# Altium PCB PCB_23GXSTM32F1031.0EXP_2026-02-23.pcbdoc (part 1 of 2)
Units mil, origin at the board's own origin, x right, y up, seen from the top; angles counter-clockwise.
Board outline 5147 x 5153.94 mil, 2 copper layers (Top Layer, Bottom Layer); 48 components, 78 nets, 348 pads, 55 vias.
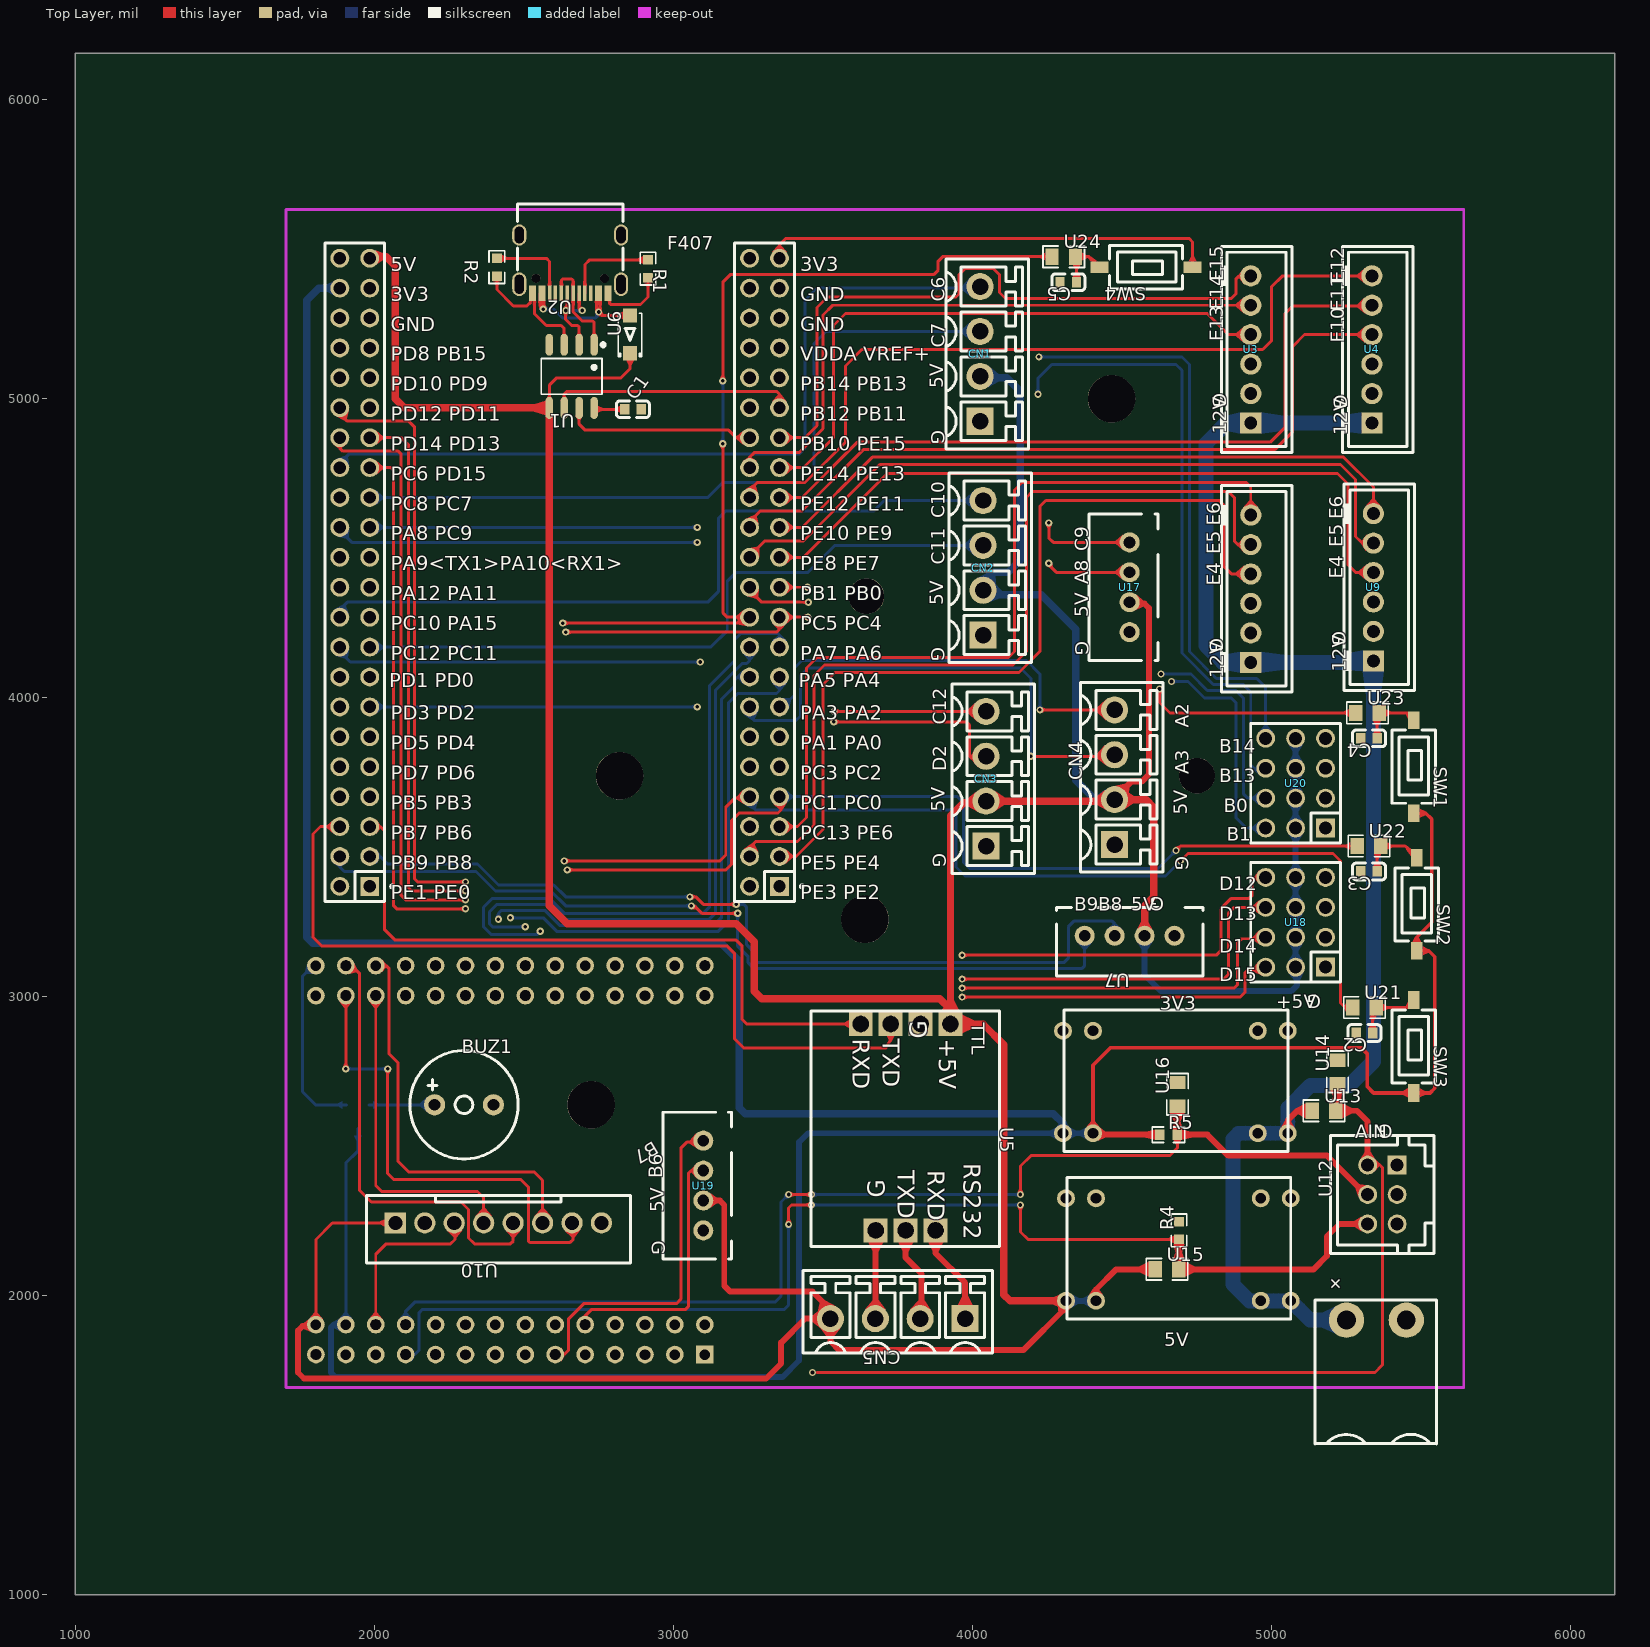
[diagram p0: Top Layer view]
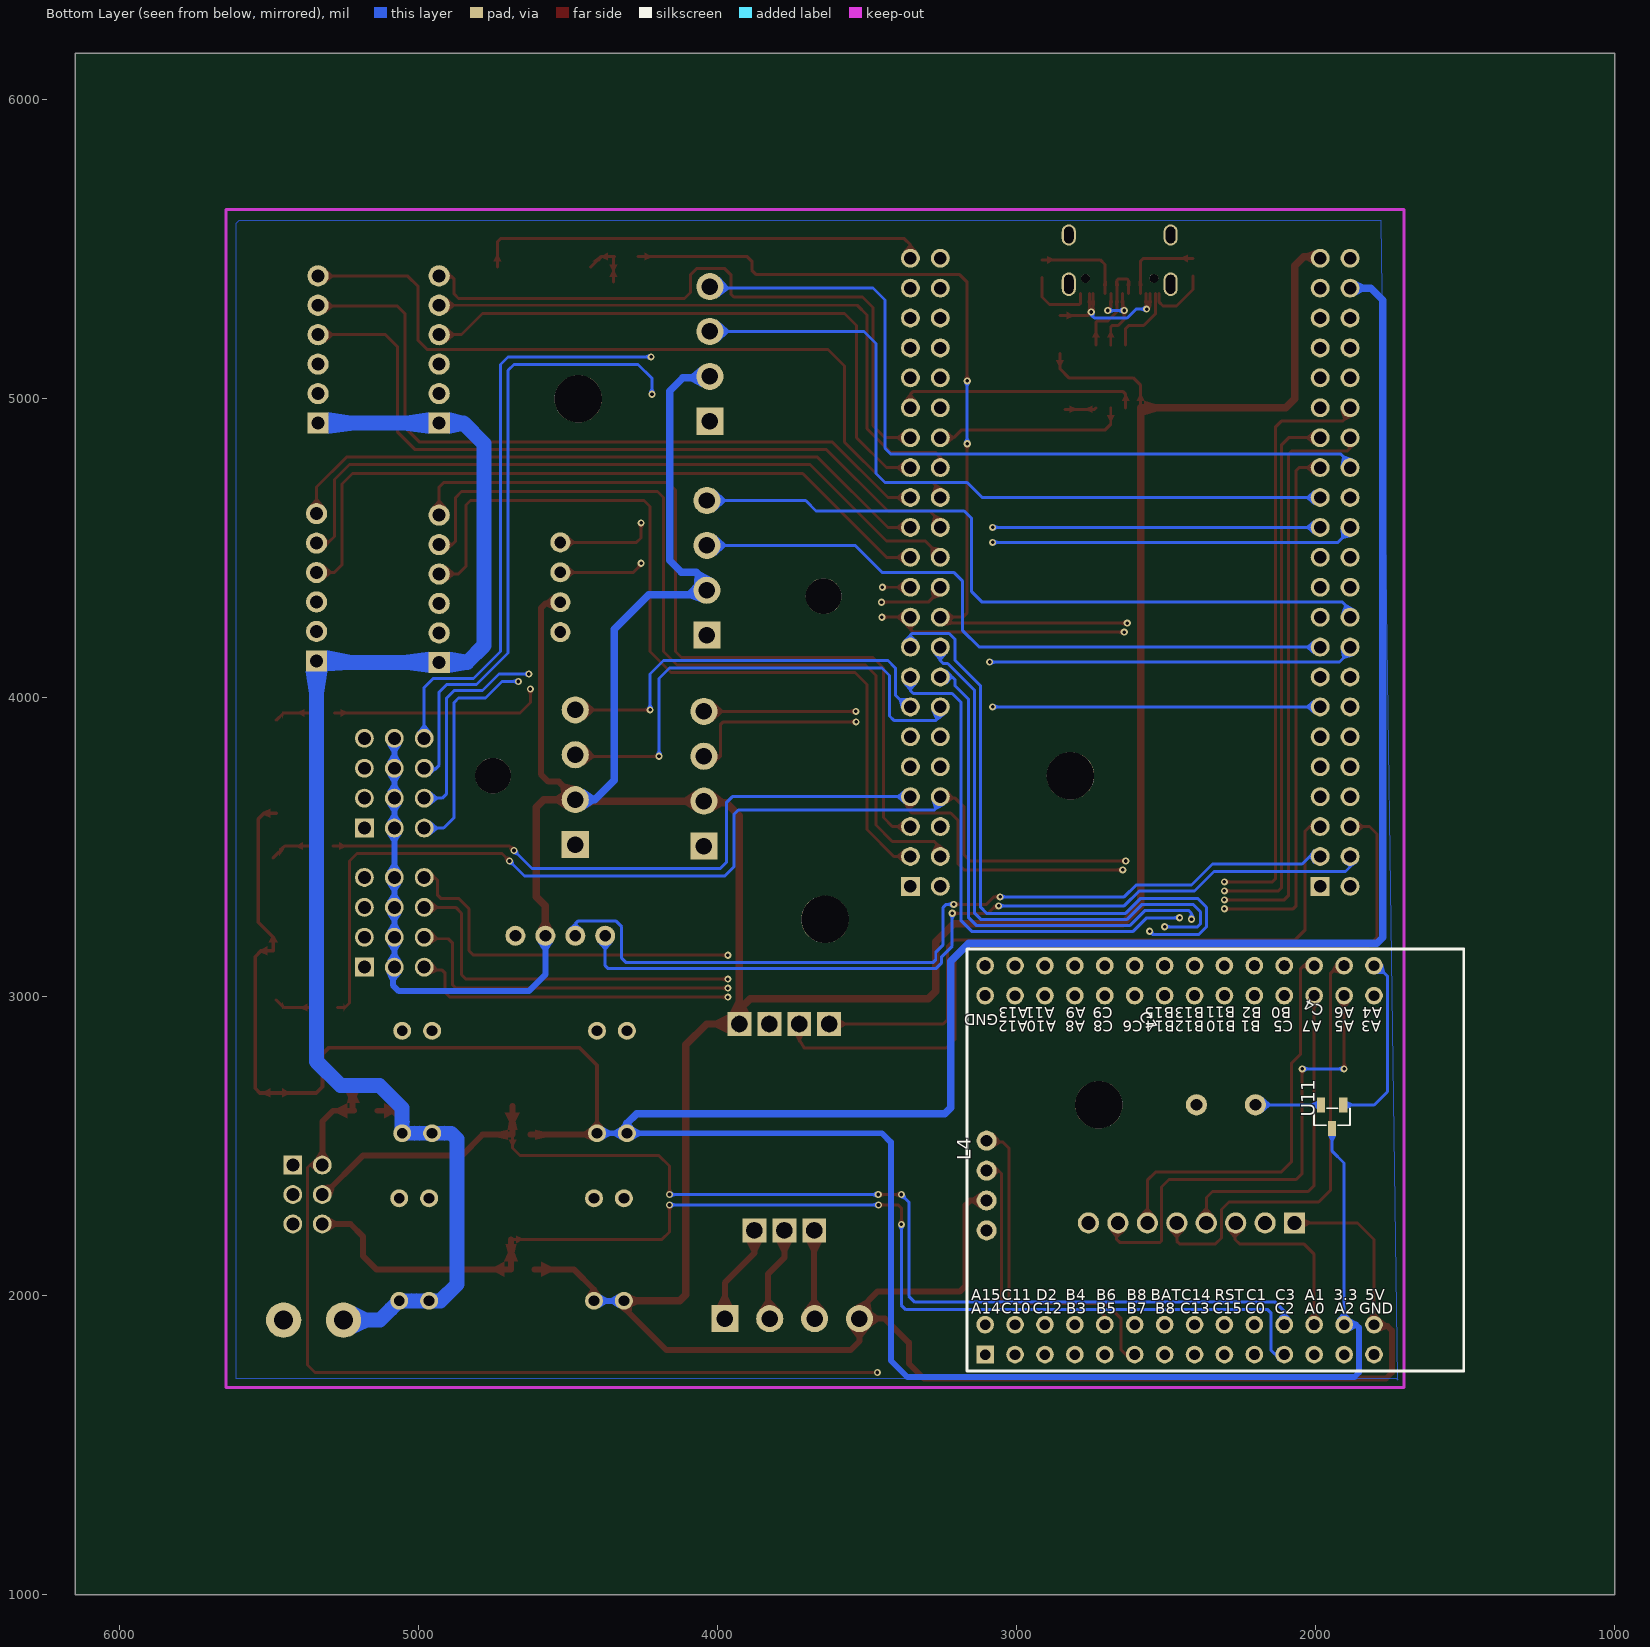
[diagram p1: Bottom Layer view, seen from below]

## Layer stack, top to bottom
Top Layer: signal copper (thickness not stored)
Dielectric: dielectric 12.6, FR-4, Dk 4.8
Bottom Layer: signal copper (thickness not stored)

## Board outline
6147,1000 1000,1000 1000,6153.94 6147,6153.94

## Components (designator, comment, footprint, x,y, rotation, side; value= is the part's Value field where it differs from the comment)
3V3 "降压24到5V最大5AFIX" 降压24到5V最大5AFIX 4660,2718.39 r180 top
5V "降压24到5V最大5AFIX" 降压24到5V最大5AFIX 4670,2158.39 r180 top
12V "CONN-TH_6P-P2.50_B6B-XH-A-LF-SN" CONN-TH_6P-P2.50_B6B-XH-A-LF-SN 4930,4363.39 r90 top
+ "CONN-TH_WJ2EDGR-5.08-2P" CONN-TH_WJ2EDGR-5.08-2P 5350,1918.39 r0 top
BUZ1 "BUZ-TH_BD9.0-P5.00-D0.6-FD" BUZ-TH_BD9.0-P5.00-D0.6-FD 2300,2638.39 r0 top
C1 "C0603" C0603 2865,4963.39 r0 top
C2 "C0603" C0603 5310,2878.39 r180 top
C3 "C0603" C0603 5325,3418.39 r180 top
C4 "C0603" C0603 5325,3863.39 r180 top
C5 "C0603" C0603 4320,5388.39 r180 top
CN1 "CONN-TH_4P-P3.81_WJ2EDGVC-3.81-4P" CONN-TH_4P-P3.81_WJ2EDGVC-3.81-4P 4025,5148.39 r90 top
CN2 "CONN-TH_4P-P3.81_WJ2EDGVC-3.81-4P" CONN-TH_4P-P3.81_WJ2EDGVC-3.81-4P 4035,4433.39 r90 top
CN3 "CONN-TH_4P-P3.81_WJ2EDGVC-3.81-4P" CONN-TH_4P-P3.81_WJ2EDGVC-3.81-4P 4045,3728.39 r90 top
CN4 "CONN-TH_4P-P3.81_WJ2EDGVC-3.81-4P" CONN-TH_4P-P3.81_WJ2EDGVC-3.81-4P 4475,3733.39 r90 top
CN5 "CONN-TH_4P-P3.81_WJ2EDGVC-3.81-4P" CONN-TH_4P-P3.81_WJ2EDGVC-3.81-4P 3750,1923.39 r180 top
F407 "STM32F407VGT6B1" STM32F407VGT6B1 2675,4448.39 r0 top
L4 "STM32L431RCT6XPB" STM32L431RCT6XPB 1805,3103.39 r270 bottom
R1 "R0603" R0603 2915,5433.39 r270 top
R2 "R0603" R0603 2410,5438.39 r270 top
R4 "R0603" R0603 4690,2218.39 r90 top
R5 "R0603" R0603 4655,2538.39 r0 top
SW1 "SW-SMD_L6.1-W3.6-LS7.9" SW-SMD_L6.1-W3.6-LS7.9 5475,3768.39 r270 top
SW2 "SW-SMD_L6.1-W3.6-LS7.9" SW-SMD_L6.1-W3.6-LS7.9 5485,3308.39 r270 top
SW3 "SW-SMD_L6.1-W3.6-LS7.9" SW-SMD_L6.1-W3.6-LS7.9 5475,2833.39 r270 top
SW4 "SW-SMD_L6.1-W3.6-LS7.9" SW-SMD_L6.1-W3.6-LS7.9 4580,5438.39 r180 top
U1 "SOP-8_L4.9-W3.9-P1.27-LS6.0-BL" SOP-8_L4.9-W3.9-P1.27-LS6.0-BL 2660,5073.39 r180 top
U2 "USB-C_SMD-TYPE-C-31-M-12" USB-C_SMD-TYPE-C-31-M-12 2655,5448.39 r180 top
U3 "CONN-TH_6P-P2.50_B6B-XH-A-LF-SN" CONN-TH_6P-P2.50_B6B-XH-A-LF-SN 4930,5163.39 r90 top
U4 "CONN-TH_6P-P2.50_B6B-XH-A-LF-SN" CONN-TH_6P-P2.50_B6B-XH-A-LF-SN 5335,5163.39 r90 top
U5 "TTL2RS232" TTL2RS232 3775,2553.39 r270 top
U6 "SOD-123FL_L2.8-W1.8-LS3.7-RD" SOD-123FL_L2.8-W1.8-LS3.7-RD 2855,5213.39 r90 top
U7 "CONN-TH_B4B-XH-A-LF-SN" CONN-TH_B4B-XH-A-LF-SN 4525,3203.39 r180 top
U9 "CONN-TH_6P-P2.50_B6B-XH-A-LF-SN" CONN-TH_6P-P2.50_B6B-XH-A-LF-SN 5340,4368.39 r90 top
U10 "CONN-TH_B8B-XH-A-LF-SN" CONN-TH_B8B-XH-A-LF-SN 2415,2243.39 r180 top
U11 "SOT-23-3_L2.9-W1.3-P1.90-LS2.4-BR" SOT-23-3_L2.9-W1.3-P1.90-LS2.4-BR 1945,2598.39 r270 bottom
U12 "CONN-TH_6P-P2.50_HCTL_HC-XHD-2X3A" CONN-TH_6P-P2.50_HCTL_HC-XHD-2X3A 5370,2338.39 r90 top
U13 "R0805" R0805 5175,2618.39 r0 top
U14 "R0805" R0805 5220,2748.39 r90 top
U15 "R0805" R0805 4650,2088.39 r0 top
U16 "R0805" R0805 4685,2673.39 r90 top
U17 "CONN-TH_B4B-XH-A-LF-SN" CONN-TH_B4B-XH-A-LF-SN 4525,4368.39 r90 top
U18 "HDR-TH_12P-P2.54-V-M-R3-C4-S2.54" HDR-TH_12P-P2.54-V-M-R3-C4-S2.54 5080,3248.39 r90 top
U19 "CONN-TH_B4B-XH-A-LF-SN" CONN-TH_B4B-XH-A-LF-SN 3100,2368.39 r90 top
U20 "HDR-TH_12P-P2.54-V-M-R3-C4-S2.54" HDR-TH_12P-P2.54-V-M-R3-C4-S2.54 5080,3713.39 r90 top
U21 "R0805" R0805 5310,2963.39 r0 top
U22 "R0805" R0805 5325,3503.39 r0 top
U23 "R0805" R0805 5320,3948.39 r0 top
U24 "R0805" R0805 4305,5473.39 r0 top

## Footprints (in the part's own frame and the unit in brackets; to place one, negate y for a bottom-side part, rotate by r counter-clockwise, add the part's x,y. Pads: shape width x height; smd on the part's side, far side on the other; paste and mask are expansions set on the pad)
BUZ-TH_BD9.0-P5.00-D0.6-FD [mm]
  round 1.8 hole 1 paste+0 mask+0.051: 1(-2.5,0) 2(2.5,0)
  silkscreen extent -4.6,-4.6 4.6,4.6
C0603 [mm]
  rect 0.8x0.9 smd paste+0 mask+0.051: 1(-0.7,0) 2(0.7,0)
  silkscreen extent -1.41,-0.71 1.39,0.72
CONN-TH_4P-P3.81_WJ2EDGVC-3.81-4P [mm]
  rect 2.3x2.3 hole 1.4 paste+0 mask+0.051: 1(-5.715,0)
  round 2.3 hole 1.4 paste+0 mask+0.051: 2(-1.905,0) 3(1.905,0) 4(5.715,0)
  silkscreen extent -8.06,-4.1 8.06,2.9
CONN-TH_6P-P2.50_B6B-XH-A-LF-SN [mm]
  rect 1.8x1.8 hole 1.1 paste+0 mask+0.051: 1(-6.251,0.001)
  round 1.8 hole 1.1 paste+0 mask+0.051: 2(-3.749,-0.001) 3(-1.249,-0.001) 4(1.251,-0.001) 5(3.751,-0.001) 6(6.251,-0.001)
  silkscreen extent -8.75,-3.5 8.75,2.5
CONN-TH_6P-P2.50_HCTL_HC-XHD-2X3A [mm]
  rect 1.6x1.6 hole 1.1 paste+0 mask+0.05: 1(2.5,-1.25)
  round 1.6 hole 1.1 paste+0 mask+0.05: 2(2.5,1.25) 3(0,-1.25) 4(0,1.25) 5(-2.5,-1.25) 6(-2.5,1.25)
  silkscreen extent -5,-4.4 5,4.4
CONN-TH_B4B-XH-A-LF-SN [mm]
  round 1.7 hole 1 paste+0 mask+0.051: 1(-3.81,0) 2(-1.27,0) 3(1.27,0) 4(3.81,0)
  silkscreen extent -6.22,-2.41 6.22,3.43
CONN-TH_B8B-XH-A-LF-SN [mm]
  rect 1.8x1.8 hole 1.2 paste+0 mask+0.051: 1(8.75,0)
  round 1.8 hole 1.2 paste+0 mask+0.051: 2(6.25,0) 3(3.75,0) 4(1.25,0) 5(-1.25,0) 6(-3.75,0) 7(-6.25,0) 8(-8.75,0)
  silkscreen extent -11.22,-2.35 11.22,3.4
CONN-TH_WJ2EDGR-5.08-2P [mm]
  round 3 hole 1.6 paste+0 mask+0.051: 1(-2.54,0) 2(2.54,0)
  silkscreen extent -5.21,-10.5 5.12,1.7
HDR-TH_12P-P2.54-V-M-R3-C4-S2.54 [mm]
  rect 1.6x1.6 hole 1.1 paste+0 mask+0.05: 1(-3.81,-2.54)
  round 1.6 hole 1.1 paste+0 mask+0.05: 2(-3.81,0) 3(-3.81,2.54) 4(-1.27,-2.54) 5(-1.27,0) 6(-1.27,2.54) 7(1.27,-2.54) 8(1.27,0) 9(1.27,2.54) 10(3.81,-2.54) 11(3.81,0) 12(3.81,2.54)
  silkscreen extent -5.08,-3.81 5.08,3.81
R0603 [mil]
  rect 31.75x34.02 smd paste-3937.01 mask+2: 1(-29.65,0) 2(29.66,0)
  silkscreen extent -55,-26 55,26
R0805 [mil]
  rect 44.59x54.21 smd paste-3937.01 mask+2: 1(-39.37,0) 2(39.37,0)
  silkscreen extent -69,-36 69,36
SOD-123FL_L2.8-W1.8-LS3.7-RD [mm]
  rect 1.2x1.2 smd paste+0 mask+0.051: 1(-1.6,0) 2(1.6,0)
  silkscreen extent -1.9,-1 1.8,1
SOP-8_L4.9-W3.9-P1.27-LS6.0-BL [mm]
  oval 0.63x1.865 smd paste+0 mask+0.051: 1(-1.905,-2.682) 2(-0.635,-2.682) 3(0.635,-2.682) 4(1.905,-2.682) 5(1.905,2.682) 6(0.635,2.682) 7(-0.635,2.682) 8(-1.905,2.682)
  silkscreen extent -2.82,-2.83 2.58,1.52
SOT-23-3_L2.9-W1.3-P1.90-LS2.4-BR [mm]
  rect 1.25x0.7 smd paste+0 mask+0.051: 1(-1,0.95) 2(-1,-0.95) 3(1,0)
  silkscreen extent -0.73,-1.53 0.73,1.53
STM32F407VGT6B1 [mm]
  rect 1.6x1.6 hole 1.05 paste+0 mask+0.051: 1(-17.526,-27.432) 1(17.264,-27.432)
  round 1.6 hole 1.05 paste+0 mask+0.051: 2(-20.066,-27.432) 2(14.724,-27.432) 3(-17.526,-24.892) 3(17.264,-24.892) 4(-20.066,-24.892) 4(14.724,-24.892) 5(-17.526,-22.352) 5(17.264,-22.352) 6(-20.066,-22.352) 6(14.724,-22.352) 7(-17.526,-19.812) 7(17.264,-19.812) 8(-20.066,-19.812) 8(14.724,-19.812) 9(-17.526,-17.272) 9(17.264,-17.272) 10(-20.066,-17.272) 10(14.724,-17.272) 11(-17.526,-14.732) 11(17.264,-14.732) 12(-20.066,-14.732) 12(14.724,-14.732) 13(-17.526,-12.192) 13(17.264,-12.192) 14(-20.066,-12.192) 14(14.724,-12.192) 15(-17.526,-9.652) 15(17.264,-9.652) 16(-20.066,-9.652) 16(14.724,-9.652) 17(-17.526,-7.112) 17(17.264,-7.112) 18(-20.066,-7.112) 18(14.724,-7.112) 19(-17.526,-4.572) 19(17.264,-4.572) 20(-20.066,-4.572) 20(14.724,-4.572) 21(-17.526,-2.032) 21(17.264,-2.032) 22(-20.066,-2.032) 22(14.724,-2.032) 23(-17.526,0.508) 23(17.264,0.508) 24(-20.066,0.508) 24(14.724,0.508) 25(-17.526,3.048) 25(17.264,3.048) 26(-20.066,3.048) 26(14.724,3.048) 27(-17.526,5.588) 27(17.264,5.588) 28(-20.066,5.588) 28(14.724,5.588) 29(-17.526,8.128) 29(17.264,8.128) 30(-20.066,8.128) 30(14.724,8.128) 31(-17.526,10.668) 31(17.264,10.668) 32(-20.066,10.668) 32(14.724,10.668) 33(-17.526,13.208) 33(17.264,13.208) 34(-20.066,13.208) 34(14.724,13.208) 35(-17.526,15.748) 35(17.264,15.748) 36(-20.066,15.748) 36(14.724,15.748) 37(-17.526,18.288) 37(17.264,18.288) 38(-20.066,18.288) 38(14.724,18.288) 39(-17.526,20.828) 39(17.264,20.828) 40(-20.066,20.828) 40(14.724,20.828) 41(-17.526,23.368) 41(17.264,23.368) 42(-20.066,23.368) 42(14.724,23.368) 43(-17.526,25.908) 43(17.264,25.908) 44(-20.066,25.908) 44(14.724,25.908)
  silkscreen extent -21.34,-28.7 19.3,27.18
STM32L431RCT6XPB [mm]
  rect 1.5x1.5 hole 0.9 paste+0 mask+0.051: 1(33.02,-33.02)
  round 1.5 hole 0.9 paste+0 mask+0.051: 2(30.48,-33.02) 3(33.02,-30.48) 4(30.48,-30.48) 5(33.02,-27.94) 6(30.48,-27.94) 7(33.02,-25.4) 8(30.48,-25.4) 9(33.02,-22.86) 12(30.48,-20.32) 13(33.02,-17.78) 14(30.48,-17.78) 15(33.02,-15.24) 16(30.48,-15.24) 17(33.02,-12.7) 18(30.48,-12.7) 20(30.48,-10.16) 23(33.02,-5.08) 25(33.02,-2.54) 26(30.48,-2.54) 28(30.48,0) 29(2.54,0) 30(0,0) 34(0,-5.08) 40(0,-12.7) 42(0,-15.24) 45(2.54,-20.32) 46(0,-20.32) 47(2.54,-22.86) 48(0,-22.86) 49(2.54,-25.4) 50(0,-25.4) 51(2.54,-27.94) 52(0,-27.94) 53(2.54,-30.48) 54(0,-30.48)
  round 1.5 hole 0.9 slot 0.905 at 90 deg paste+0 mask+0.051: 10(30.48,-22.86) 11(33.02,-20.32) 19(33.02,-10.16) 21(33.02,-7.62) 22(30.48,-7.62) 24(30.48,-5.08) 27(33.02,0) 31(2.54,-2.54) 32(0,-2.54) 33(2.54,-5.08) 35(2.54,-7.62) 36(0,-7.62) 37(2.54,-10.16) 38(0,-10.16) 39(2.54,-12.7) 41(2.54,-15.24) 43(2.54,-17.78) 44(0,-17.78) 55(2.54,-33.02) 56(0,-33.02)
  silkscreen extent -1.4,-34.54 34.42,7.62
SW-SMD_L6.1-W3.6-LS7.9 [mm]
  rect 1.5x1 smd paste+0 mask+0.051: 1(-3.95,0) 2(3.95,0)
  silkscreen extent -3.1,-1.85 3.1,1.85
TTL2RS232 [mil]
  rect 80x80 hole 54 slot 54.2 at 0 deg paste+0 mask+2: 1(-355,151.26) 2(-355,51.26) 3(-355,-48.74) 4(-355,-148.74) 5(335,101.26) 6(335,1.26) 7(335,-98.74)
  silkscreen extent -399,-315 389,315
USB-C_SMD-TYPE-C-31-M-12 [mm]
  oval 1.2x2 hole 0.8 slot 1.6 at 90 deg paste+0 mask+0.051: 0(-4.325,1.706) 1(4.325,1.706)
  oval 1.2x1.8 hole 0.8 slot 1.4 at 90 deg paste+0 mask+0.051: 2(4.325,-2.474) 3(-4.325,-2.474)
  rect 0.3x1.3 smd paste-100 mask+0.051: A1(-3.35,2.474) A4(-2.55,2.474) A5(-1.25,2.474) A6(-0.25,2.474) A7(0.25,2.474) A8(1.25,2.474) A9(2.55,2.474) A12(3.35,2.474) B1(3.05,2.474) B4(2.25,2.474) B5(1.75,2.474) B6(0.75,2.474) B7(-0.75,2.474) B8(-1.75,2.474) B9(-2.25,2.474) B12(-3.05,2.474)
  round 0.75 hole 0.75 unplated paste+0: ""(-2.9,1.206) ""(2.9,1.206)
  silkscreen extent -4.47,-5.09 4.47,0.49
降压24到5V最大5AFIX [mil]
  round 60 hole 36 paste+0 mask+2: 1(-393.71,175.2) 1(-293.71,175.2) 2(-393.71,-167.32) 2(-293.71,-167.32) 3(257.47,175.2) 3(357.47,175.19) 4(257.47,-167.32) 4(357.47,-167.33)
  silkscreen extent -394,-236 354,236

## Free pads (board coordinates)
  round 158.74 hole 158.74 unplated paste+0: ""(2725,2638.39) ""(2820,3738.39) ""(3640,3258.39) ""(4465,4998.39)
  round 119.37 hole 119.37 unplated paste+0: ""(3645,4338.39) ""(4750,3738.39)

## Via types
v1: diameter 24, hole 12, Top Layer to Bottom Layer, tented both sides, 55 vias

## Nets (pads, with @x,y where several pads share a name; then routed paths per layer and width w, separated by ;. In a path a pad name is that pad's centre, name@x,y a point inside that pad or via, vN(x,y) a via of type N, cw(c..) or ccw(c..) an arc to the next point about the centre after c; other vN are vias at no path point)
3V3: 3V3.3 F407.42@1885,5368.39 L4.26 R5.1 SW1.2 SW2.2 SW3.2 U11.3 | length 12346.2
  Top Layer w12.01: 3V3.3@4402.53,2543.19 4402.5,2770.89 4460,2828.39 5300,2828.39 5320,2808.39 5320,2698.39 5340.5,2677.89 SW3.2@5475,2677.87 5529.5,2677.89 5545,2693.39 5545,3133.39 5525.5,3152.89 SW2.2@5485,3152.87 5485,3198.39 5535,3248.39 5535,3593.39 5515.5,3612.89 SW1.2@5475,3612.87
  Top Layer w20: 3V3.3@4402.53,2543.19 4407.3,2538.39 R5.1@4625.35,2538.39
  Bottom Layer w10: L4.26@1905,1903.39 1905,2443.39 1945,2483.39 U11.3@1945,2559.02
  Bottom Layer w20: L4.26@1905,1903.39 1865,1903.39 1855,1893.39 1855,1743.39 1870,1728.39 3365,1728.39 3420,1783.39 3420,2513.39 3449.82,2543.21 3V3.3@4302.53,2543.2 3V3.3@4402.53,2543.19
  Bottom Layer w25: F407.42@1885,5368.39 1815,5368.39 1775,5328.39 1775,3198.39 1795,3178.39 2115,3178.39 3160,3178.39 3220,3118.39 3220,2628.39 3240,2608.39 4270,2608.39 4302.52,2575.87 3V3.3@4302.53,2543.2
3V3VDE1: F407.43@3354.68,5468.39 SW4.1 | length 1522.8
  Top Layer w10: F407.43@3354.68,5468.39 3354.68,5513.07 3375,5533.39 4635,5533.39 4725,5533.39 4735.5,5522.89 SW4.1@4735.51,5438.39
5V: 5V.3 CN1.2 CN2.2 CN3.2 CN4.2 CN5.4 F407.43@1985,5468.39 L4.28 U1.5 U5.1 U6.1 U7.2 U10.1 U15.1 U17.2 U18.2 U18.5 U18.8 U18.11 U19.2 U20.2 U20.5 U20.8 U20.11 | length 16880.8
  Top Layer w10: L4.28@1805,1903.39 1805,2188.39 1860,2243.39 U10.1@2070.51,2243.39 ; U1.5@2585,4967.78 2585,5043.39 2610,5068.39 2825,5068.39 2855,5098.39 U6.1@2855,5150.4
  Top Layer w20: L4.28@1805,1903.39 1800,1898.39 1760,1898.39 1745,1883.39 1745,1743.39 1765,1723.39 3310,1723.39 3360,1773.39 3360,1843.39 3440,1923.39 CN5.4@3525.01,1923.39 ; U19.2@3100,2318.39 3155,2318.39 3170,2303.39 3170,2033.39 3190,2013.39 3465,2013.39 3525,1953.39 CN5.4@3525.01,1923.39 ; 5V.3@4312.53,1983.2 4312.52,1960.91 4170,1818.39 3555,1818.39 3525,1848.39 CN5.4@3525.01,1923.39 ; 5V.3@4412.53,1983.19 4412.5,2020.89 4480,2088.39 U15.1@4610.63,2088.39 ; CN4.2@4475,3658.38 4475,3663.39 4530,3718.39 4565,3718.39 4590,3743.39 4590,4298.39 4575,4313.39 4530,4313.39 U17.2@4525,4318.39
  Top Layer w25: F407.43@1985,5468.39 1990,5473.39 2040,5473.39 2070,5443.39 2070,4998.39 2100.6,4967.79 U1.5@2585,4967.78 2585,3303.39 2645,3243.39 3210,3243.39 3270,3183.39 3270,3018.39 3295,2993.39 3890,2993.39 3926.3,2957.09 U5.1@3926.26,2908.39 ; 5V.3@4312.53,1983.2 4125.2,1983.19 4105,2003.39 4105,2838.39 4035,2908.39 U5.1@3926.26,2908.39 ; U7.2@4575,3203.39 4575,3303.39 4605,3333.39 4605,3633.39 4579.99,3658.39 CN4.2@4475,3658.38 4469.99,3653.39 CN3.2@4045,3653.38 4040,3648.39 3970,3648.39 3926.3,3604.69 U5.1@3926.26,2908.39
  Bottom Layer w20: 5V.3@4312.53,1983.2 5V.3@4412.53,1983.19 ; U7.2@4575,3203.39 4575,3073.39 4630,3018.39 5065,3018.39 5085,3038.39 5085,3093.39 U18.2@5080,3098.39 U18.5@5080,3198.39 U18.8@5080,3298.39 U18.11@5080,3398.39 U20.2@5080,3563.39 U20.5@5080,3663.39 U20.8@5080,3763.39 U20.11@5080,3863.39
  Bottom Layer w25: CN1.2@4025,5073.38 4030,5068.39 4115,5068.39 4160,5023.39 4160,4458.39 4120,4418.39 4070,4418.39 4035,4383.39 CN2.2@4035,4358.38 4050,4343.39 4230,4343.39 4345,4228.39 4345,3723.39 4409.99,3658.39 CN4.2@4475,3658.38
12V: 3V3.1 5V.1 12V.1 +.1 U3.1 U4.1 U9.1 U13.1 | length 4863.1
  Top Layer w20: 3V3.1@5053.71,2543.19 5053.7,2587.09 5085,2618.39 U13.1@5135.63,2618.39
  Bottom Layer w50: +.1@5250,1918.39 5128.5,1918.39 5V.1@5063.71,1983.19 5V.1@4963.71,1983.19 4925.2,1983.19 4870,2038.39 4870,2523.39 4889.8,2543.19 3V3.1@4953.71,2543.19 3V3.1@5053.71,2543.19 5053.7,2627.09 5130,2703.39 5260,2703.39 5340,2783.39 U9.1@5339.97,4122.28 5335,4117.29 12V.1@4929.97,4117.28 4836.1,4117.29 4780,4173.39 4780,4848.39 4848.9,4917.29 U3.1@4929.97,4917.28 U4.1@5334.97,4917.28
B0: F407.21@3354.68,4368.39 U20.6 | length 2236.6
  Top Layer w10: F407.21@3354.68,4368.39 v1(3448.35,4368.39)
  Mid-Layer 2 w10: v1(3448.35,4368.39) 3490,4368.39 3535,4323.39 3535,4098.39 3555,4078.39 v1(4630,4078.39)
  Bottom Layer w10: v1(4630,4078.39) 4730,4078.39 4785,4023.39 4880,4023.39 4905,3998.39 4905,3678.39 4920,3663.39 U20.6@4980,3663.39
B1: F407.22@3254.68,4368.39 U20.3 | length 2424.7
  Top Layer w10: F407.22@3254.68,4368.39 3254.68,4358.71 3295,4318.39 v1(3451.31,4318.39)
  Mid-Layer 2 w10: v1(3451.31,4318.39) 3485,4318.39 3505,4298.39 3505,4068.39 3520,4053.39 v1(4665,4053.39)
  Bottom Layer w10: v1(4665,4053.39) 4720,4053.39 4775,3998.39 4865,3998.39 4880,3983.39 4880,3598.39 4915,3563.39 U20.3@4980,3563.39
B13: F407.35@3354.68,5068.39 U20.9 | length 2981.4
  Mid-Layer 2 w10: F407.35@3354.68,5068.39 3900,5068.39 3955,5013.39 v1(4218.69,5013.39)
  Bottom Layer w10: v1(4218.69,5013.39) 4218.69,5067.07 4265,5113.39 4680,5113.39 4700,5093.39 4700,4148.39 4805,4043.39 4905,4043.39 4930,4018.39 4930,3773.39 4945,3758.39 4975,3758.39 U20.9@4980,3763.39
B14: F407.36@3254.68,5068.39 U20.12 | length 2953
  Mid-Layer 2 w10: F407.36@3254.68,5068.39 3254.68,5083.07 3285,5113.39 3940,5113.39 3965,5138.39 v1(4221.69,5138.39)
  Bottom Layer w10: v1(4221.69,5138.39) 4700,5138.39 4725,5113.39 4725,4153.39 4815,4063.39 4950,4063.39 4980,4033.39 U20.12@4980,3863.39
BUZSWT: BUZ1.1 U11.2 | length 219.4
  Bottom Layer w10: U11.2@1982.4,2637.75 2200.9,2637.79 BUZ1.1@2201.56,2638.39
C0: F407.7@3354.68,3668.39 L4.37 U22.1 | length 3933.4
  Top Layer w10: v1(2645,3423.39) 3175,3423.39 3195,3443.39 3195,3588.39 3220,3613.39 3350,3613.39 3360,3623.39 3360,3663.07 F407.7@3354.68,3668.39 ; v1(4680,3488.39) 4695,3503.39 U22.1@5285.63,3503.39
  Mid-Layer 2 w10: L4.37@2205,3003.39 2230,3003.39 2255,3028.39 2255,3388.39 2290,3423.39 v1(2645,3423.39)
  Bottom Layer w10: F407.7@3354.68,3668.39 3950,3668.39 3970,3648.39 3970,3448.39 3990,3428.39 4620,3428.39 v1(4680,3488.39)
C1: F407.8@3254.68,3668.39 L4.38 U21.1 | length 4309.7
  Top Layer w10: v1(2635,3453.39) 3155,3453.39 3175,3473.39 3175,3633.39 3205,3663.39 3249.68,3663.39 F407.8@3254.68,3668.39 ; v1(4695,3453.39) 4720,3478.39 5205,3478.39 5230,3453.39 5230,2978.39 5245,2963.39 U21.1@5270.63,2963.39
  Mid-Layer 2 w10: L4.38@2205,3103.39 2205,3388.39 2270,3453.39 v1(2635,3453.39)
  Bottom Layer w10: F407.8@3254.68,3668.39 3254.68,3643.71 3275,3623.39 3930,3623.39 3945,3608.39 3945,3433.39 3975,3403.39 4645,3403.39 v1(4695,3453.39)
C4: F407.19@3354.68,4268.39 L4.35 U23.1 | length 4673.1
  Top Layer w10: v1(2640,4218.39) 3345,4218.39 3355,4228.39 F407.19@3354.68,4268.39 v1(3450,4268.39) ; v1(4625,4028.39) 4625,3983.39 4660,3948.39 U23.1@5280.63,3948.39
  Mid-Layer 2 w10: L4.35@2105,3003.39 2140,3003.39 2155,3018.39 2155,4183.39 2190,4218.39 v1(2640,4218.39) ; v1(3450,4268.39) 3450,4103.39 3485,4068.39 3485,4048.39 3505,4028.39 v1(4625,4028.39)
C5: F407.20@3254.68,4268.39 L4.36 U24.1 | length 4610.4
  Top Layer w10: v1(2630,4248.39) 3234.68,4248.39 F407.20@3254.68,4268.39 3180,4268.39 3165,4283.39 v1(3165,4848.39) ; v1(3165,5058.39) 3165,5388.39 3190,5413.39 3870,5413.39 3885,5428.39 3885,5458.39 3900,5473.39 U24.1@4265.63,5473.39
  Mid-Layer 2 w10: L4.36@2105,3103.39 2105,4168.39 2185,4248.39 v1(2630,4248.39)
  Bottom Layer w10: v1(3165,4848.39) v1(3165,5058.39)
CC1: R1.1 U2.A5 | length 313.6
  Top Layer w10: U2.A5@2704.21,5350.98 2704.2,5447.59 2720.3,5463.09 R1.1@2915,5463.09
CC2: R2.1 U2.B5 | length 286.9
  Top Layer w10: R2.1@2410,5468.09 2575.3,5468.09 2586.1,5457.29 U2.B5@2586.1,5350.98
D12: F407.34@1885,4968.39 U18.12 | length 5003.4
  Top Layer w10: F407.34@1885,4968.39 1885,4948.39 1910,4923.39 2115,4923.39 2135,4903.39 2135,3393.39 2145,3383.39 v1(2305,3383.39) ; v1(3965,3138.39) 3985,3138.39 4815,3138.39 4830,3153.39 4830,3293.39 4865,3328.39 4925,3328.39 4935,3338.39 4935,3388.39 4945,3398.39 U18.12@4980,3398.39
  Mid-Layer 2 w10: v1(2305,3383.39) 2550,3383.39 2645,3288.39 2645,3228.39 2655,3218.39 3195,3218.39 3275,3138.39 v1(3965,3138.39)
D13: F407.31@1985,4868.39 U18.9 | length 4910.3
  Top Layer w10: F407.31@1985,4868.39 2090,4868.39 2115,4843.39 2115,4768.39 2115,3363.39 2125,3353.39 v1(2305,3353.39) ; v1(3965,3058.39) 4840,3058.39 4855,3073.39 4855,3278.39 4875,3298.39 U18.9@4980,3298.39
  Mid-Layer 2 w10: v1(2305,3353.39) 2555,3353.39 2625,3283.39 2625,3213.39 2640,3198.39 3180,3198.39 3235,3143.39 3235,3078.39 3255,3058.39 v1(3965,3058.39)
D14: F407.32@1885,4868.39 U18.6 | length 4999.6
  Top Layer w10: F407.32@1885,4868.39 1885,4833.39 1895,4823.39 2060,4823.39 2080,4823.39 2090,4813.39 2090,3338.39 2105,3323.39 v1(2305,3323.39) ; v1(3965,3028.39) 4875,3028.39 4885,3038.39 4885,3178.39 4900,3193.39 4975,3193.39 U18.6@4980,3198.39
  Mid-Layer 2 w10: v1(2305,3323.39) 2555,3323.39 2605,3273.39 2605,3188.39 2615,3178.39 3170,3178.39 3215,3133.39 3215,3048.39 3215,3038.39 3225,3028.39 v1(3965,3028.39)
D15: F407.29@1985,4768.39 U18.3 | length 4774.2
  Top Layer w10: F407.29@1985,4768.39 2055,4768.39 2065,4758.39 2065,4703.39 2065,3303.39 2075,3293.39 v1(2305,3293.39) ; v1(3965,2998.39) 4895,2998.39 4910,3013.39 4910,3078.39 4920,3088.39 4970,3088.39 U18.3@4980,3098.39
  Mid-Layer 2 w10: v1(2305,3293.39) 2555,3293.39 2585,3263.39 2585,3173.39 2600,3158.39 3160,3158.39 3190,3128.39 3190,3023.39 3215,2998.39 v1(3965,2998.39)
D+: U1.1 U2.A6 U2.B6 | length 350.1
  Top Layer w10: U2.B6@2625.47,5350.98 2625.5,5393.89 2630,5398.39 2660,5398.39 2664.8,5393.19 U2.A6@2664.84,5350.98 2664.8,5288.59 2695,5258.39 2730,5258.39 2735,5253.39 U1.1@2735,5179
D-: U1.2 U2.A7 U2.B7 | length 321.5
  Top Layer w10: U2.A7@2645.16,5350.98 2645.2,5298.59 v1(2640,5293.39) 2640,5263.39 2660,5243.39 2680,5243.39 2685,5238.39 U1.2@2685,5179 ; U2.B7@2684.53,5350.98 2684.5,5303.89 v1(2695,5293.39)
  Bottom Layer w10: v1(2640,5293.39) v1(2695,5293.39)
DRDY: L4.34 U10.6 | length 1357.5
  Top Layer w10: L4.34@2005,3103.39 2040,3103.39 2050,3093.39 2050,2808.39 2080,2778.39 2080,2448.39 2115,2413.39 2535,2413.39 2562.64,2385.75 U10.6@2562.64,2243.39
E4: 12V.4 F407.3@3354.68,3468.39 | length 2858
  Top Layer w10: F407.3@3354.68,3468.39 3410,3468.39 3500,3558.39 3500,4043.39 3540,4083.39 4155,4083.39 4225,4153.39 4225,4638.39 4245,4658.39 4825,4658.39 4840,4643.39 4840,4438.39 4865,4413.39 12V.4@4930,4412.69
E5: 12V.5 F407.4@3254.68,3468.39 | length 2953.3
  Top Layer w10: F407.4@3254.68,3468.39 3254.68,3498.07 3275,3518.39 3415,3518.39 3470,3573.39 3470,4073.39 3505,4108.39 4135,4108.39 4180,4153.39 4180,4668.39 4200,4688.39 4855,4688.39 4875,4668.39 4875,4523.39 4890,4508.39 4927.35,4508.39 12V.5@4930.03,4511.06
E6: 12V.6 F407.5@3354.68,3568.39 | length 2761
  Top Layer w10: F407.5@3354.68,3568.39 3415,3568.39 3445,3598.39 3445,4098.39 3480,4133.39 4120,4133.39 4140,4153.39 4140,4693.39 4165,4718.39 4915,4718.39 4930,4703.39 12V.6@4930.03,4609.49
E7: F407.23@3354.68,4468.39 U9.4 | length 2396.1
  Top Layer w10: F407.23@3354.68,4468.39 3435,4468.39 3715,4748.39 5220,4748.39 5255,4713.39 5255,4443.39 5280,4418.39 U9.4@5340,4417.69
E8: F407.24@3254.68,4468.39 U9.5 | length 2436.4
  Top Layer w10: F407.24@3254.68,4468.39 3254.7,4473.09 3305,4523.39 3435,4523.39 3690,4778.39 5230,4778.39 5280,4728.39 5280,4538.39 5300,4518.39 5337.7,4518.39 U9.5@5340.03,4516.06
E9: F407.25@3354.68,4568.39 U9.6 | length 2213
  Top Layer w10: F407.25@3354.68,4568.39 3430,4568.39 3665,4803.39 5240,4803.39 5340,4703.39 U9.6@5340.03,4614.49
E10: F407.26@3254.68,4568.39 U4.4 | length 2526
  Top Layer w10: F407.26@3254.68,4568.39 3254.7,4588.09 3290,4623.39 3430,4623.39 3635,4828.39 5010,4828.39 5070,4888.39 5070,5173.39 5110,5213.39 U4.4@5335,5212.69
E11: F407.27@3354.68,4668.39 U4.5 | length 2469.2
  Top Layer w10: F407.27@3354.68,4668.39 3430,4668.39 3615,4853.39 4995,4853.39 5045,4903.39 5045,5283.39 5070,5308.39 5332.35,5308.39 U4.5@5335.03,5311.06
E12: F407.28@3254.68,4668.39 U4.6 | length 2656.6
  Top Layer w10: F407.28@3254.68,4668.39 3254.7,4693.09 3280,4718.39 3440,4718.39 3575,4853.39 3575,5108.39 3630,5163.39 4970,5163.39 5000,5193.39 5000,5373.39 5035,5408.39 5333.9,5408.39 U4.6@5335.03,5409.49
E13: F407.29@3354.68,4768.39 U3.4 | length 2037.3
  Top Layer w10: F407.29@3354.68,4768.39 3435,4768.39 3535,4868.39 3535,5243.39 3575,5283.39 4785,5283.39 4855,5213.39 U3.4@4930,5212.69
E14: F407.30@3254.68,4768.39 U3.5 | length 2143
  Top Layer w10: F407.30@3254.68,4768.39 3254.7,4803.09 3270,4818.39 3420,4818.39 3500,4898.39 3500,5278.39 3532.7,5311.09 U3.5@4930.03,5311.06
E15: F407.31@3354.68,4868.39 U3.6 | length 2216.2
  Top Layer w10: F407.31@3354.68,4868.39 3440,4868.39 3480,4908.39 3480,5303.39 3515,5338.39 3945,5338.39 3955,5348.39 3955,5413.39 3975,5433.39 4070,5433.39 4090,5413.39 4090,5353.39 4110,5333.39 4865,5333.39 4880,5348.39 4880,5398.39 4890,5408.39 4928.92,5408.39 U3.6@4930.03,5409.49
G: L4.30 U11.1 | length 611.7
  Bottom Layer w10: L4.30@1805,3103.39 1795,3103.39 1760,3068.39 1760,2682.19 1804.4,2637.79 U11.1@1907.6,2637.75
GMD: C5.2
GND: 3V3.2 3V3.4 5V.2 5V.4 12V.2 +.2 BUZ1.2 C1.2 C2.2 C3.2 C4.2 CN1.1 CN2.1 CN3.1 CN4.1 F407.39 F407.40 F407.41@3354.68,5368.39 F407.42@3254.68,5368.39 L4.27 L4.55 L4.56 R1.2 R2.2 R4.2 U1.3 U2.A1 U2.A12 U2.B1 U2.B12 U3.2 U4.2 U5.2 U7.1 U9.2 U10.2 U12.1 U12.3 U12.5 U14.2 U16.2 U17.1 U18.1 U18.4 U18.7 U18.10 U19.1 U20.1 U20.4 U20.7 U20.10 | length 698.4
  Top Layer w10: R2.2@2410,5408.73 2410,5363.39 2465,5308.39 2510,5308.39 2523.1,5321.49 U2.A12@2523.11,5350.97 ; U2.B1@2534.93,5350.97 2534.9,5283.49 2575,5243.39 2625,5243.39 2635,5233.39 U1.3@2635,5179 ; U2.A1@2786.89,5350.98 2786.9,5316.49 2790,5313.39 2890,5313.39 2915,5338.39 R1.2@2915,5403.73
L4MISO1: L4.32 U10.5 | length 1489.4
  Top Layer w10: L4.32@1905,3103.39 1925,3103.39 1950,3078.39 1950,2353.39 1990,2313.39 2290,2313.39 2315,2288.39 2315,2193.39 2335,2173.39 2455,2173.39 2464.2,2182.59 U10.5@2464.21,2243.39
L4MOSI1: L4.33 U10.4 | length 1096.6
  Top Layer w10: L4.33@2005,3003.39 2005,2368.39 2025,2348.39 2345,2348.39 2365,2328.39 U10.4@2365.79,2243.39
L4NSS1: L4.31 U10.7 | length 1616.5
  Top Layer w10: v1(1905,2758.39) L4.31@1905,3003.39 ; v1(2045,2758.39) 2045,2408.39 2065,2388.39 2490,2388.39 2515,2363.39 2515,2183.39 2520,2178.39 2655,2178.39 2665,2188.39 2665,2239.49 U10.7@2661.06,2243.39
  Bottom Layer w10: v1(1905,2758.39) v1(2045,2758.39)
L4SCK1: L4.24 U10.3 | length 576.8
  Top Layer w10: L4.24@2005,1903.39 2005,2138.39 2040,2173.39 2255,2173.39 2270,2188.39 2270,2240.79 U10.3@2267.36,2243.39
L4SCL1: L4.10 U19.3 | length 886.6
  Top Layer w10: L4.10@2705,1903.39 2705,1933.39 2725,1953.39 3040,1953.39 3050,1963.39 3050,2408.39 3060,2418.39 U19.3@3100,2418.39
L4SDA1: L4.11 U19.4 | length 1148.5
  Top Layer w10: L4.11@2605,1803.39 2635,1803.39 2650,1818.39 2650,1923.39 2700,1973.39 3010,1973.39 3025,1988.39 3025,2493.39 3045,2513.39 3095,2513.39 U19.4@3100,2518.39
M3V3: L4.22 R5.2 U12.4 U16.1 | length 3950.3
  Top Layer w10: v1(3385,2338.39) v1(3462.09,2338.39) ; v1(4160,2338.39) 4160,2433.39 4195,2468.39 4660,2468.39 4684.7,2493.69 R5.2@4684.65,2538.39
  Top Layer w20: U16.1@4685,2634.01 4685,2538.69 R5.2@4684.65,2538.39 4785,2538.39 4855,2468.39 5185,2468.39 5315,2338.39 U12.4@5320.79,2338.39
  Bottom Layer w10: L4.22@2105,1903.39 2105,1948.39 2135,1978.39 3340,1978.39 3360,1998.39 3360,2313.39 v1(3385,2338.39) ; v1(3462.09,2338.39) v1(4160,2338.39)
M5V: L4.21 R4.1 U12.6 U15.2 | length 3988.3
  Top Layer w10: v1(3385,2238.39) 3385,2293.39 3395,2303.39 v1(3461.35,2303.39) ; v1(4160,2303.39) 4160,2213.39 4185.3,2188.69 R4.1@4690,2188.73
  Top Layer w20: R4.1@4690,2188.73 U15.2@4689.37,2088.39 5140,2088.39 5185,2133.39 5185,2198.39 5226.6,2239.99 U12.6@5320.79,2239.96
  Bottom Layer w10: L4.21@2105,1803.39 2135,1803.39 2150,1818.39 2150,1943.39 2160,1953.39 3370,1953.39 3385,1968.39 v1(3385,2238.39) ; v1(3461.35,2303.39) v1(4160,2303.39)
M12V: L4.19 U12.2 U13.2 U14.1 | length 4285.5
  Top Layer w10: 3480,1743.39 5310,1743.39 5345,1743.39 5370,1768.39 5370,2428.39 5360,2438.39 5322.4,2438.39 U12.2@5320.79,2436.81
  Top Layer w20: U14.1@5220,2709.01 5220,2623.99 U13.2@5214.37,2618.39 5285,2618.39 5320.8,2582.59 U12.2@5320.79,2436.81
  Mid-Layer 2 w10: L4.19@2205,1803.39 2205,1758.39 2220,1743.39 v1(3465,1743.39)
OPG: CN5.3 U5.7 | length 295.5
  Top Layer w20: CN5.3@3675,1923.39 3676.3,1924.69 U5.7@3676.26,2218.39
OPRX: CN5.1 U5.5 | length 335.9
  Top Layer w20: U5.5@3876.26,2218.39 3876.3,2142.09 3975,2043.39 CN5.1@3975,1923.39
OPTX: CN5.2 U5.6 | length 319.3
  Top Layer w20: U5.6@3776.26,2218.39 3776.3,2127.09 3830,2073.39 3830,1928.39 CN5.2@3825.01,1923.39
PC5V: U2.A4 U2.A9 U2.B4 U2.B9 U6.2 | length 561.7
  Top Layer w10: U2.A9@2554.6,5350.98 2554.6,5308.79 v1(2565,5298.39) 2566.4,5299.79 U2.B4@2566.42,5350.98 ; U2.B9@2743.59,5350.98 2743.6,5294.79 v1(2750,5288.39) ; U2.A4@2755.39,5350.98 2755.4,5293.79 v1(2750,5288.39) ; U6.2@2855,5276.38 2762,5276.39 v1(2750,5288.39)
  Bottom Layer w10: v1(2565,5298.39) 2600,5298.39 2630,5268.39 2740,5268.39 2750,5278.39 v1(2750,5288.39)
RST: U10.8
RTS: U1.4
RX1: F407.6@1885,3568.39 U5.3 | length 2767.9
  Top Layer w10: F407.6@1885,3568.39 1820,3568.39 1795,3543.39 1795,3198.39 1825,3168.39 3180,3168.39 3205,3143.39 3205,2858.39 3235,2828.39 3710,2828.39 3725,2853.39 3726.3,2852.09 U5.3@3726.26,2908.39
RX2: CN4.3 F407.14@3254.68,3968.39 | length 1684.5
  Top Layer w10: v1(4195,3803.39) 4470,3803.39 CN4.3@4475,3808.39
  Bottom Layer w10: F407.14@3254.68,3968.39 3254.68,3938.71 3270,3923.39 3410,3923.39 3425,3938.39 3425,4073.39 3450,4098.39 4160,4098.39 4195,4063.39 v1(4195,3803.39)
RX3: F407.33@3354.68,4968.39 U1.6 | length 818.9
  Top Layer w10: U1.6@2635,4967.78 2635,5013.39 2645,5023.39 3345,5023.39 3355,5013.39 F407.33@3354.68,4968.39
RX4: CN2.3 F407.17@1985,4168.39 | length 2287.5
  Bottom Layer w10: F407.17@1985,4168.39 3125,4168.39 3180,4223.39 3180,4388.39 3210,4418.39 3450,4418.39 3540,4508.39 CN2.3@4035,4508.39
RX5: CN3.3 F407.13@1985,3968.39 | length 2194
  Top Layer w10: v1(3536.3,3918.39) 3980,3918.39 3990,3908.39 3990,3803.39 3995,3798.39 4040,3798.39 CN3.3@4045,3803.39
  Mid-Layer 2 w10: v1(3080,3968.39) 3145,3968.39 3195,3918.39 v1(3536.3,3918.39)
  Bottom Layer w10: F407.13@1985,3968.39 v1(3080,3968.39)
RX6: CN1.3 F407.27@1985,4668.39 | length 2524.7
  Bottom Layer w10: F407.27@1985,4668.39 3115,4668.39 3165,4718.39 3440,4718.39 3470,4748.39 3470,5183.39 3510,5223.39 CN1.3@4025,5223.39
S$110: 
S$50933: C5.1 SW4.2 U24.2 | length 180.9
  Top Layer w10: C5.1@4347.56,5388.39 4347.6,5470.19 U24.2@4344.37,5473.39 4389.5,5473.39 SW4.2@4424.49,5438.39
S$51055: C4.1 SW1.1 U23.2 | length 213.6
  Top Layer w10: C4.1@5352.56,3863.39 5352.6,3941.59 U23.2@5359.37,3948.39 5450.5,3948.39 SW1.1@5475,3923.9
S$51065: C3.1 SW2.1 U22.2 | length 226.8
  Top Layer w10: C3.1@5352.56,3418.39 5352.6,3491.59 U22.2@5364.37,3503.39 5445.5,3503.39 SW2.1@5485,3463.9
S$51075: C2.1 SW3.1 U21.2 | length 226.1
  Top Layer w10: C2.1@5337.56,2878.39 5337.6,2951.59 U21.2@5349.37,2963.39 5449.5,2963.39 SW3.1@5475,2988.9
SCL1: F407.3@1985,3468.39 U7.3 | length 2888.6
  Top Layer w10: v1(3055,3333.39) 3075,3333.39 3100,3308.39 v1(3210,3308.39)
  Bottom Layer w10: F407.3@1985,3468.39 2020,3468.39 2045,3443.39 2345,3443.39 2415,3373.39 2600,3373.39 2640,3333.39 v1(3055,3333.39) ; v1(3210,3308.39) 3235,3308.39 3245,3298.39 3245,3173.39 3270,3148.39 3270,3123.39 3280,3113.39 4305,3113.39 4320,3128.39 4320,3233.39 4340,3253.39 4465,3253.39 4475,3243.39 U7.3@4475,3203.39
SCL3: F407.26@1885,4568.39 U17.3 | length 2710.9
  Top Layer w10: v1(4255,4448.39) 4255,4443.39 4280,4418.39 U17.3@4525,4418.39
  Mid-Layer 2 w10: v1(3080,4518.39) 3920,4518.39 3990,4448.39 v1(4255,4448.39)
  Bottom Layer w10: F407.26@1885,4568.39 1885,4558.39 1925,4518.39 v1(3080,4518.39)
SDA1: F407.4@1885,3468.39 U7.4 | length 2846.1
  Top Layer w10: v1(3060,3303.39) 3070,3303.39 3095,3278.39 v1(3215,3278.39)
  Bottom Layer w10: F407.4@1885,3468.39 1885,3433.39 1900,3418.39 2340,3418.39 2405,3353.39 2590,3353.39 2640,3303.39 v1(3060,3303.39) ; v1(3215,3278.39) 3215,3168.39 3250,3133.39 3250,3113.39 3270,3093.39 4365,3093.39 4375,3103.39 U7.4@4375,3203.39
SDA3: F407.25@1985,4568.39 U17.4 | length 2640.2
  Top Layer w10: v1(4255,4583.39) 4255,4533.39 4270,4518.39 U17.4@4525,4518.39
  Mid-Layer 2 w10: v1(3080,4568.39) 3080,4583.39 3115,4618.39 3905,4618.39 3940,4583.39 v1(4255,4583.39)
  Bottom Layer w10: F407.25@1985,4568.39 v1(3080,4568.39)
TMISO: F407.17@3354.68,4168.39 L4.43 | length 2446.8
  Mid-Layer 2 w10: L4.43@2505,3003.39 2530,3003.39 2555,3028.39 v1(2555,3218.39)
  Bottom Layer w10: v1(2555,3218.39) 2545,3208.39 2390,3208.39 2365,3233.39 2365,3298.39 2395,3328.39 2585,3328.39 2635,3278.39 3100,3278.39 3120,3298.39 3120,4038.39 3205,4123.39 3205,4193.39 3225,4213.39 3350,4213.39 3355,4208.39 F407.17@3354.68,4168.39
TMOSI: F407.18@3254.68,4168.39 L4.44 | length 2034.9
  Mid-Layer 2 w10: L4.44@2505,3103.39 v1(2505,3233.39)
  Bottom Layer w10: v1(2505,3233.39) 2395,3233.39 2385,3243.39 2385,3283.39 2410,3308.39 2580,3308.39 2630,3258.39 3120,3258.39 3140,3278.39 3140,4023.39 3230,4113.39 3245,4113.39 3255,4123.39 F407.18@3254.68,4168.39
TNSS: F407.15@3354.68,4068.39 L4.41 | length 2023
  Mid-Layer 2 w10: L4.41@2405,3003.39 2435,3003.39 2455,3023.39 v1(2455,3263.39)
  Bottom Layer w10: v1(2455,3263.39) 2565,3263.39 2610,3218.39 3150,3218.39 3185,3253.39 3185,3983.39 3215,4013.39 3345,4013.39 3355,4023.39 F407.15@3354.68,4068.39
TSCK: F407.16@3254.68,4068.39 L4.39 | length 2000.5
  Mid-Layer 2 w10: L4.39@2305,3003.39 2345,3003.39 2355,3013.39 2355,3198.39 2385,3228.39 2400,3228.39 2415,3243.39 v1(2415,3258.39)
  Bottom Layer w10: v1(2415,3258.39) 2415,3278.39 2425,3288.39 2570,3288.39 2620,3238.39 3135,3238.39 3160,3263.39 3160,3993.39 3205,4038.39 3205,4058.39 3215,4068.39 F407.16@3254.68,4068.39
TX1: F407.5@1985,3568.39 U5.4 | length 2251.5
  Top Layer w10: F407.5@1985,3568.39 2020,3568.39 2035,3553.39 2035,3223.39 2070,3188.39 3210,3188.39 3230,3168.39 3230,2923.39 3245,2908.39 U5.4@3626.26,2908.39
TX2: CN4.4 F407.13@3354.68,3968.39 | length 1375.9
  Top Layer w10: v1(4225,3958.39) CN4.4@4475,3958.38
  Bottom Layer w10: F407.13@3354.68,3968.39 3365,3968.39 3405,4008.39 3405,4098.39 3430,4123.39 4180,4123.39 4225,4078.39 v1(4225,3958.39)
TX3: F407.32@3254.68,4868.39 U1.7 | length 642.7
  Top Layer w10: U1.7@2685,4967.78 2685,4913.39 2705,4893.39 3185,4893.39 3210,4868.39 F407.32@3254.68,4868.39
TX4: CN2.4 F407.20@1885,4268.39 | length 2469.7
  Bottom Layer w10: F407.20@1885,4268.39 1885,4293.39 1910,4318.39 3115,4318.39 3150,4353.39 3150,4598.39 3175,4623.39 3670,4623.39 3705,4658.39 CN2.4@4035,4658.38
TX5: CN3.4 F407.18@1885,4168.39 | length 2310.6
  Top Layer w10: v1(3537.04,3953.39) CN3.4@4045,3953.38
  Mid-Layer 2 w10: v1(3090,4118.39) 3405,4118.39 3450,4073.39 3450,3983.39 3480,3953.39 v1(3537.04,3953.39)
  Bottom Layer w10: F407.18@1885,4168.39 1885,4153.39 1920,4118.39 v1(3090,4118.39)
TX6: CN1.4 F407.30@1885,4768.39 | length 2689.4
  Bottom Layer w10: F407.30@1885,4768.39 1885,4783.39 1915,4813.39 3420,4813.39 3440,4833.39 3440,5328.39 3480,5368.39 4020,5368.39 CN1.4@4025,5373.38
V3: C1.1 U1.8 | length 104.2
  Top Layer w10: U1.8@2735,4967.78 2739.4,4963.39 C1.1@2837.45,4963.39
pads on no net: 12V.3 F407.1 F407.2 F407.6@3254.68,3568.39 F407.7@1985,3668.39 F407.8@1885,3668.39 F407.9 F407.10 F407.11 F407.12 F407.14@1885,3968.39 F407.15@1985,4068.39 F407.16@1885,4068.39 F407.19@1985,4268.39 F407.21@1985,4368.39 F407.22@1885,4368.39 F407.23@1985,4468.39 F407.24@1885,4468.39 F407.28@1885,4668.39 F407.33@1985,4968.39 F407.34@3254.68,4968.39 F407.35@1985,5068.39 F407.36@1885,5068.39 F407.37 F407.38 F407.41@1985,5368.39 F407.44 L4.1 L4.2 L4.3 L4.4 L4.5 L4.6 L4.7 L4.8 L4.9 L4.12 L4.13 L4.14 L4.15 L4.16 L4.17 L4.18 L4.20 L4.23 L4.25 L4.29 L4.40 L4.42 L4.45 L4.46 L4.47 L4.48 L4.49 L4.50 L4.51 L4.52 L4.53 L4.54 U2. U2.0 U2.1 U2.2 U2.3 U2.A8 U2.B8 U3.3 U4.3 U9.3

## Polygon pours and split planes (outlines as drawn)
GND on Bottom Layer (solid): 1780,5593.39 5600,5593.39 5610,5583.39 5610,1723.39 1730,1723.39 1725,1718.39
GND on Top Layer (solid): 1690,5613.39 5610,5613.39 5630,5593.39 5630,1708.39 5615,1693.39 1750,1693.39 1710,1733.39 1690,1753.39